# Altium PCB TSAL23.PcbDoc
Units mil, origin at the board's own origin, x right, y up, seen from the top; angles counter-clockwise.
Board outline 2050 x 2632.13 mil, 2 copper layers (Top Layer, Bottom Layer); 42 components, 47 nets, 195 pads, 55 vias.
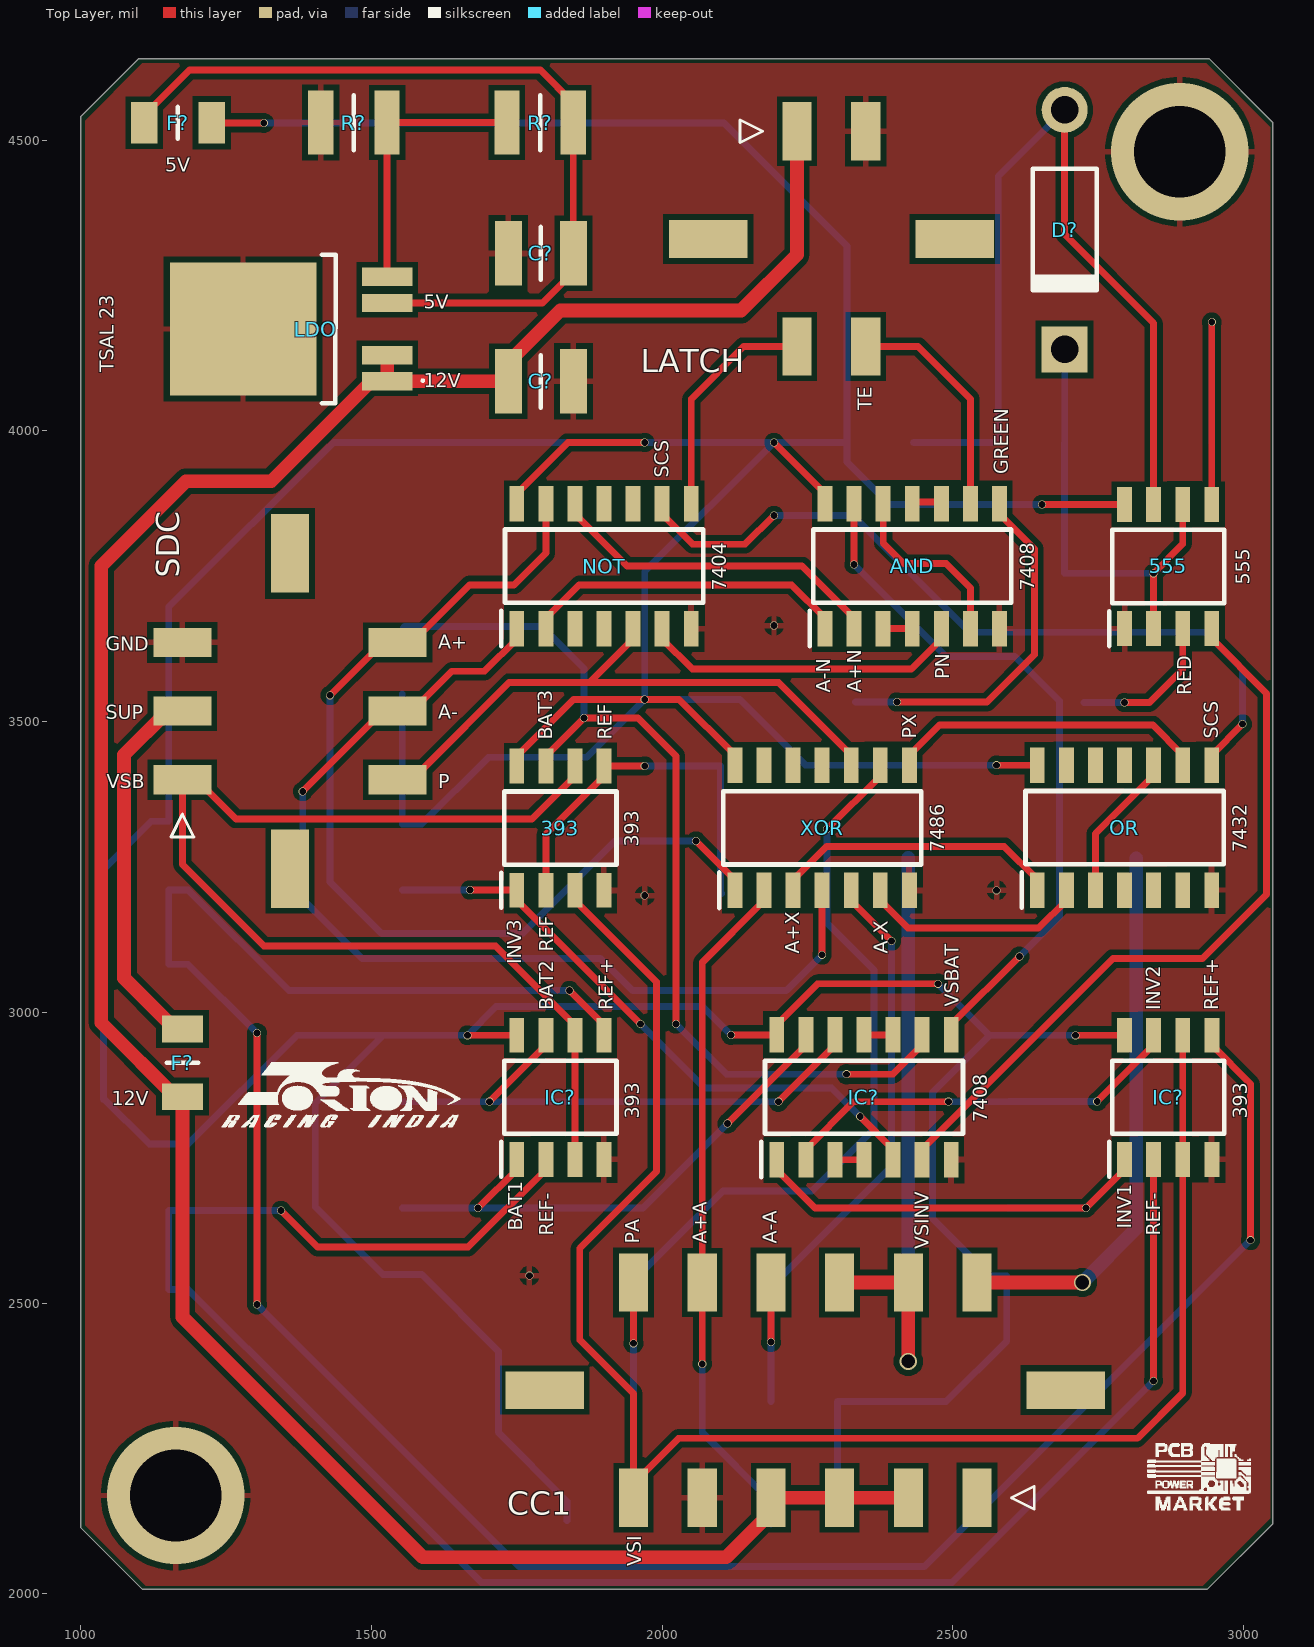
[diagram p0: Top Layer view]
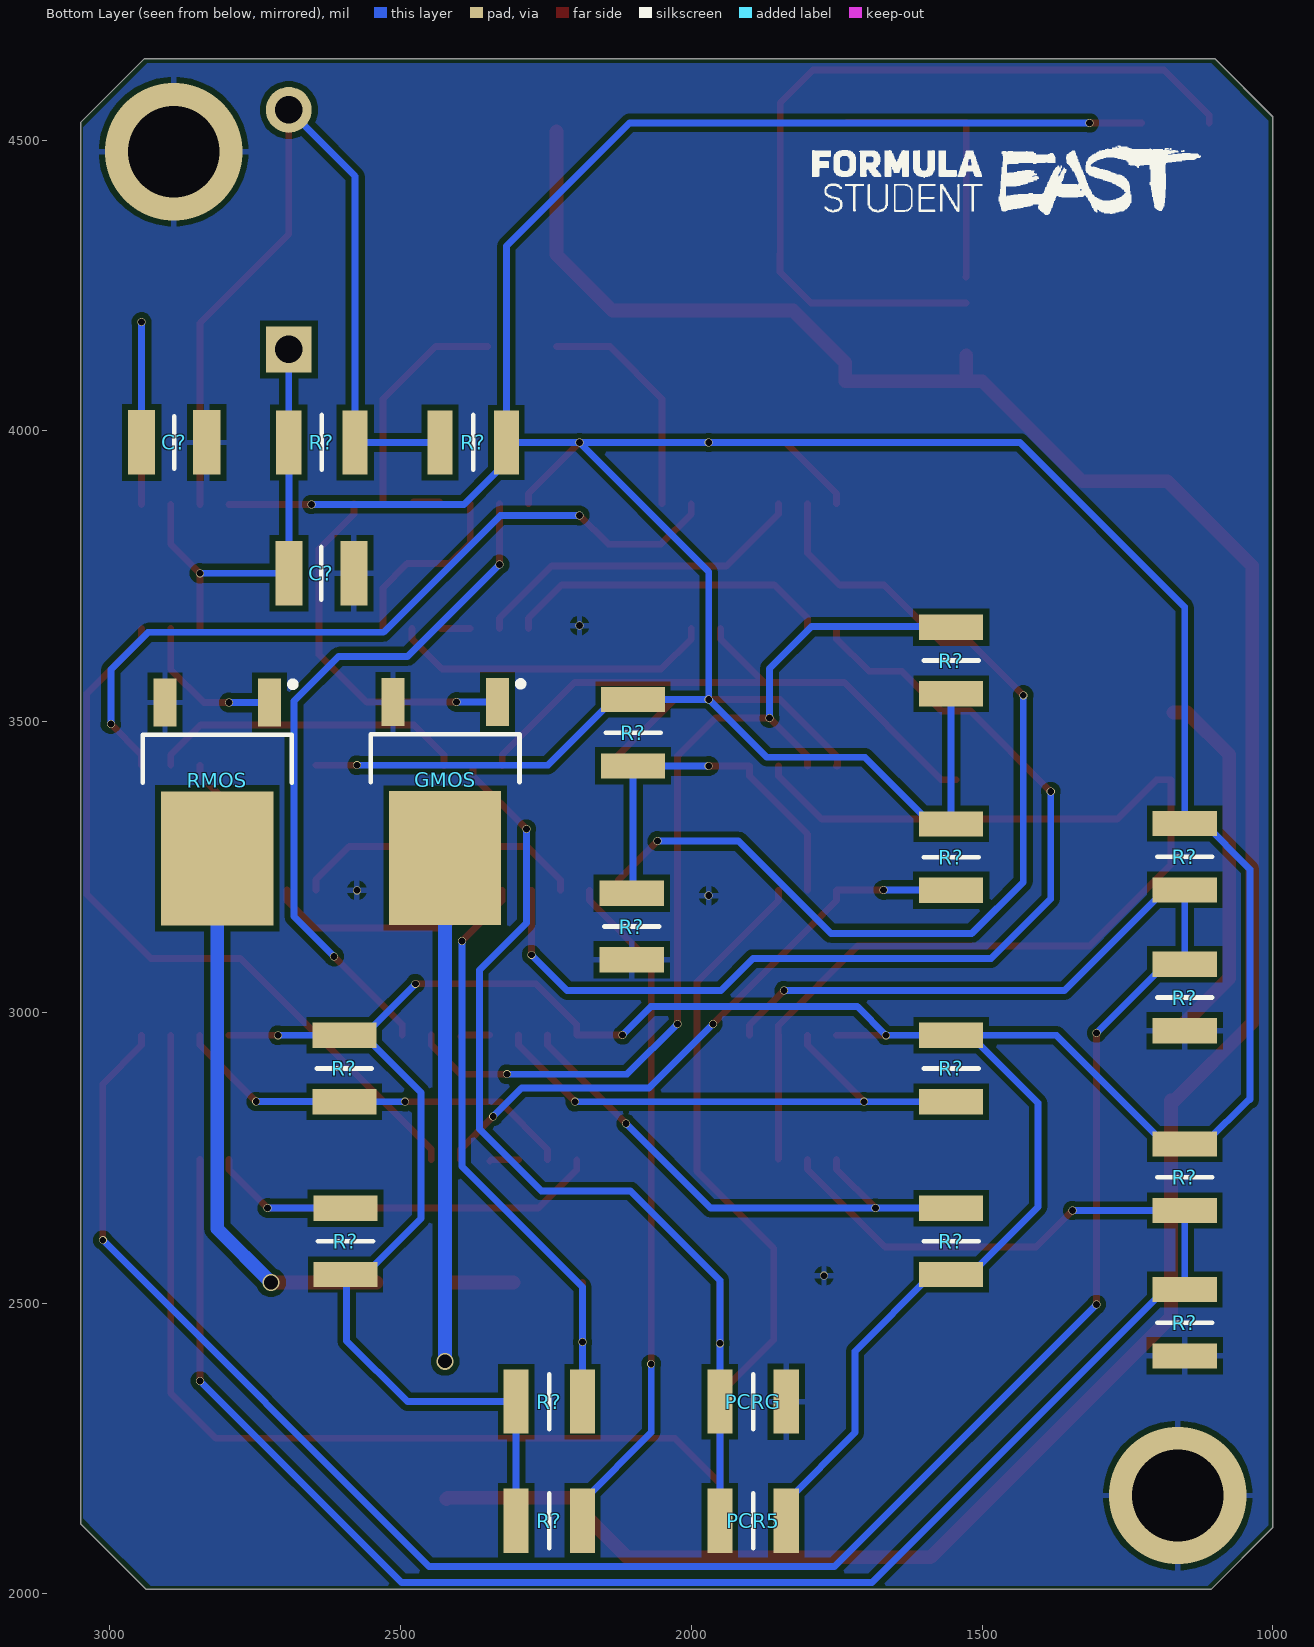
[diagram p1: Bottom Layer view, seen from below]
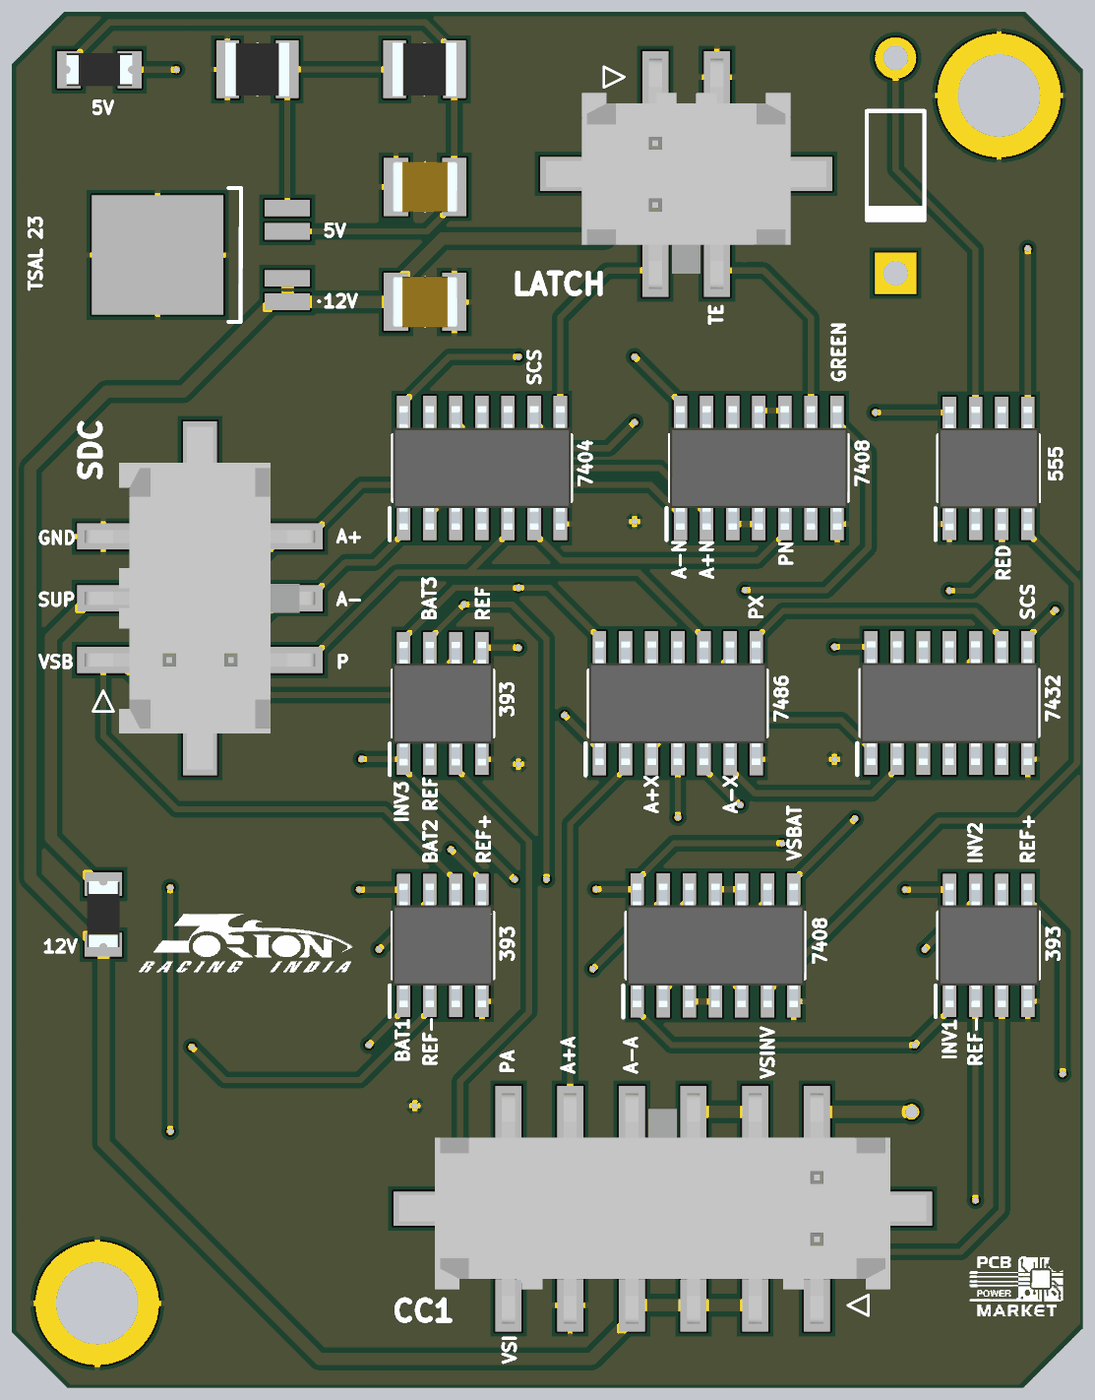
[diagram p2: 3D render of the assembled board from above, using the file's embedded part models]
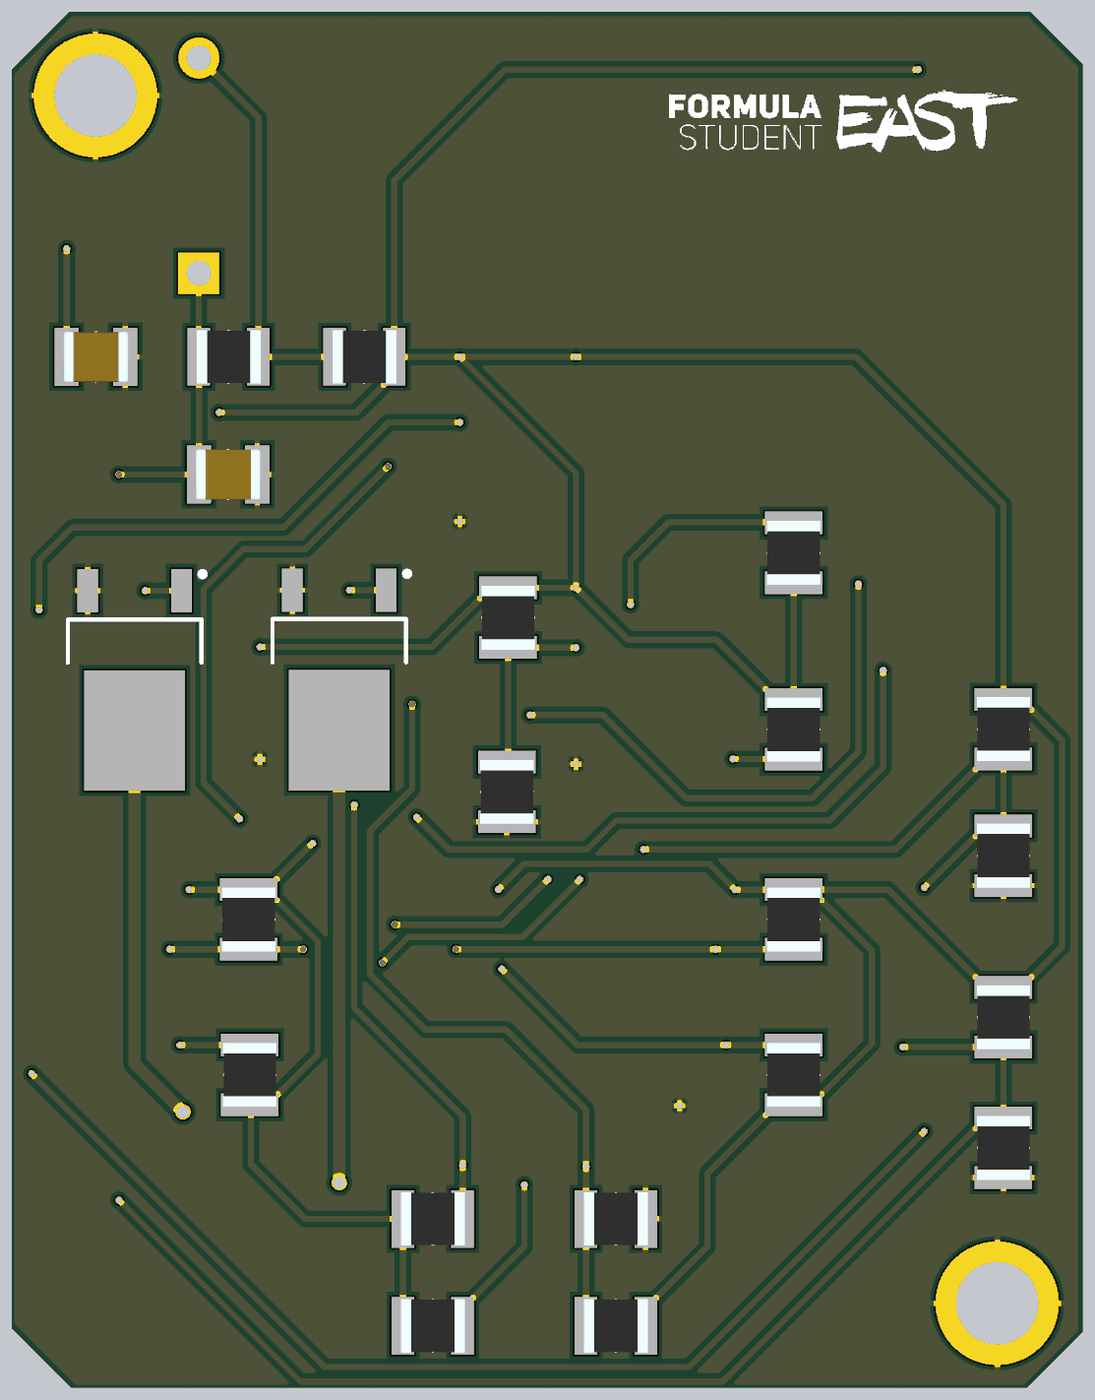
[diagram p3: 3D render of the assembled board from below, using the file's embedded part models]

## Layer stack, top to bottom
Top Solder: solder mask 0.4, Solder Resist, Dk 3.5
Top Layer: signal copper 1.4
Dielectric 1: dielectric 12.6, FR-4, Dk 4.8
Bottom Layer: signal copper 1.4
Bottom Solder: solder mask 0.4, Solder Resist, Dk 3.5

## Board outline
2937.01,2007.87 3049.21,2120.08 3050,2120.08 3050,4530 2940,4640 1100,4640 1000,4540 1000,2114.17 1106.3,2007.87

## Design rules (kind name [scope] priority, off if disabled: settings)
Clearance [All] p1: gap=10 ignorepadtopadclearanceinfootprint=FALSE except(0: Arc-Hole Track-Hole SMDPad-Hole THPad-Hole Via-Hole Fill-Hole Poly-Hole Region-Hole Text-Hole)
PolygonConnect [All] p1: connectstyle=Relief reliefconductorwidth=10 reliefentries=4 polygonreliefangle="90 Angle" airgapwidth=10
RoutingVias [All] p1: holewidth=11.81 width=13.78 viastyle="Through Hole" minholewidth=11.81 minwidth=13.78 maxholewidth=11.81 maxwidth=13.78
SolderMaskExpansion [All] p1: expansion=4 istentingtop=FALSE
Width [All] p1: maxlimit=23.62 minlimit=11.81 preferedwidth=23.62
30 further rules are at their usual default settings.

## Classes and differential pairs
component class TSAL23: 393 555 AND C? CC1 D? F? GMOS IC? LATCH LDO NOT OR PCR5 PCRG R? RMOS SDC XOR

## Components (designator, comment, footprint, x,y, rotation, side; value= is the part's Value field where it differs from the comment)
393 "LM393D" SOIC127P600X175-8N 1825,3316.77 r90 top
555 "NE555DRG4" SOIC127P600X175-8N 2870,3766.77 r90 top
AND "MC74HC08ADG" SOIC127P600X175-14N 2430,3767.28 r90 top
C? "10uF" CAPC3225X145N 1791.34,4305.12 r180 top
C? "10uF" CAPC3225X145N 1791.34,4085 r0 top
C? "0.1uF" CAPC3225X145N 2889,3980 r0 bottom
C? "10uF" CAPC3225X145N 2636,3755 r0 bottom
CC1 "43045-1219" 43045-12YY_181920 2246.06,2350.39 r0 top
D? "Diode 1N4007" DO-41 2692,4345.91 r270 top
F? "NANOSMDC020F-2" NANOSMDC016F2 1167.32,4529.53 r180 top
F? "NANOSMDC020F-2" NANOSMDC016F2 1175.2,2913.39 r90 top
GMOS "STD10NF10T4" TO228P972X240-3N 2423.23,3362.2 r270 bottom
IC? "LM393D" SOIC127P600X175-8N 1825,2854 r90 top
IC? "MC74HC08ADG" SOIC127P600X175-14N 2347,2854 r90 top
IC? "LM393D" SOIC127P600X175-8N 2870.08,2854 r90 top
LATCH "43045-0419" 43045-04YY_181920 2290.94,4330.04 r180 top
LDO "TLF1963TEATMA1" TLF1963TEATMA1 1360,4175 r90 top
NOT "MC74AC04DG" SOIC127P600X175-14N 1900,3767.28 r90 top
OR "MC74HC32ADG" SOIC127P600X175-14N 2795,3317.72 r90 top
PCR5 "10K" RESC3126X60N 1893.7,2125.98 r180 bottom
PCRG "10K" RESC3126X60N 1893.7,2330.71 r0 bottom
R? "10K" RESC3126X60N 1553.1,2903.54 r90 bottom
R? "10K" RESC3126X60N 2594.49,2606.3 r270 bottom
R? "1.2K" RESC3126X60N 1151.57,3267.72 r90 bottom
R? "10K" RESC3126X60N 1151.57,2716.54 r90 bottom
R? "10K" RESC3126X60N 2596.46,2903.54 r90 bottom
R? "10K" RESC3126X60N 1151.57,3025.59 r90 bottom
R? "1.2K" RESC3126X60N 1151.57,2466.54 r90 bottom
R? "10K" RESC3126X60N 1553.15,2606.3 r270 bottom
R? "10K" RESC3126X60N 2244.09,2330.71 r0 bottom
R? "10K" RESC3126X60N 2100,3481 r90 bottom
R? "3.9K" RESC3126X60N 2102.36,3147.64 r90 bottom
R? "10K" RESC3126X60N 2244.09,2125.98 r0 bottom
R? "10K" RESC3126X60N 1553.1,3267.09 r90 bottom
R? "220K" RESC3126X60N 2635,3980 r180 bottom
R? "10K" RESC3126X60N 1790,4530 r0 top
R? "3.3K" RESC3126X60N 1470,4530 r180 top
R? "10K" RESC3126X60N 1553.1,3605 r270 bottom
R? "220K" RESC3126X60N 2375,3980 r180 bottom
RMOS "STD10NF10T4" TO228P972X240-3N 2815,3361.46 r270 bottom
SDC "43045-0619" 43045-06YY_181920 1360.04,3518.11 r270 top
XOR "MC74HC86ADG" SOIC127P600X175-14N 2275,3317.28 r90 top

## Footprints (in the part's own frame and the unit in brackets; to place one, negate y for a bottom-side part, rotate by r counter-clockwise, add the part's x,y. Pads: shape width x height; smd on the part's side, far side on the other; paste and mask are expansions set on the pad)
43045-04YY_181920 [mm]
  rect 1.27x2.54 smd: 1(1.5,-4.7) 2(-1.5,-4.7) 3(1.5,4.7) 4(-1.5,4.7)
  rect 3.43x1.65 smd: 5(5.385,0) 6(-5.385,0)
  silkscreen extent 3,-5.2 4,-4.2, body extent -6.83,-5.6 6.83,5.6, height 9.96
43045-06YY_181920 [mm]
  rect 1.27x2.54 smd: 1(3,-4.7) 2(0,-4.7) 3(-3,-4.7) 4(3,4.7) 5(0,4.7) 6(-3,4.7)
  rect 3.43x1.65 smd: 7(6.885,0) 8(-6.885,0)
  silkscreen extent 4.5,-5.2 5.5,-4.2, body extent -8.32,-5.6 8.32,5.6, height 9.96
43045-12YY_181920 [mm]
  rect 1.27x2.54 smd: 1(7.5,-4.7) 2(4.5,-4.7) 3(1.5,-4.7) 4(-1.5,-4.7) 5(-4.5,-4.7) 6(-7.5,-4.7) 7(7.5,4.7) 8(4.5,4.7) 9(1.5,4.7) 10(-1.5,4.7) 11(-4.5,4.7) 12(-7.5,4.7)
  rect 3.43x1.65 smd: 13(11.385,0) 14(-11.385,0)
  silkscreen extent 9,-5.2 10,-4.2, body extent -12.83,-5.6 12.83,5.6, height 9.95
CAPC3225X145N [mm]
  rect 1.18x2.82 smd: 1(-1.42,0) 2(1.42,0)
  silkscreen extent 0,-1.15 0,1.15, body extent -1.6,-1.25 1.6,1.25, height 1.45
DO-41 [mm] "Diode, Axial; Body 5.2 x 2.7 mm (LxDia. max), Lead Dia. 0.86 mm (max)"
  round 2 hole 1.2: 1(-5.23,0)
  rect 2x2 hole 1.2: 2(5.23,0)
  silkscreen extent -2.65,-1.4 2.75,1.4
NANOSMDC016F2 [mm]
  rect 1.16x1.81 smd: 1(-1.475,0) 2(1.475,0)
  silkscreen extent 0,-0.69 0,0.69, body extent -1.6,-0.79 1.6,0.79, height 0.82
RESC3126X60N [mm]
  rect 1.1x2.8 smd: 1(-1.45,0) 2(1.45,0)
  silkscreen extent 0,-1.2 0,1.2, body extent -1.55,-1.3 1.55,1.3, height 0.6
SOIC127P600X175-8N [mm]
  rect 1.525x0.65 smd: 1(-2.712,1.905) 2(-2.712,0.635) 3(-2.712,-0.635) 4(-2.712,-1.905) 5(2.712,-1.905) 6(2.712,-0.635) 7(2.712,0.635) 8(2.712,1.905)
  silkscreen extent -3.47,-2.45 1.6,2.58, body extent -3,-2.45 3,2.45, height 1.75
SOIC127P600X175-14N [mm]
  rect 1.55x0.65 smd: 1(-2.725,3.81) 2(-2.725,2.54) 3(-2.725,1.27) 4(-2.725,0) 5(-2.725,-1.27) 6(-2.725,-2.54) 7(-2.725,-3.81) 8(2.725,-3.81) 9(2.725,-2.54) 10(2.725,-1.27) 11(2.725,0) 12(2.725,1.27) 13(2.725,2.54) 14(2.725,3.81)
  silkscreen extent -3.5,-4.33 1.6,4.48, body extent -3,-4.33 3,4.33, height 1.75
TLF1963TEATMA1 [mm]
  rect 0.8x2.2 smd: 1(-2.28,-4.25) 2(-1.14,-4.25) 4(1.14,-4.25) 5(2.28,-4.25)
  rect 5.8x6.4 smd: 3(0,2.05)
  silkscreen extent -3.25,-5.85 3.25,-1.4
TO228P972X240-3N [mm]
  rect 2.1x1 smd: 1(-4.35,2.28) 3(-4.35,-2.28)
  rect 5.85x4.9 smd: 4(2.45,0)
  silkscreen extent -5.27,-3.25 -0.85,3.42

## Part data
393 IC? IC?: "Integrated Circuit", Manufacturer_Name=STMicroelectronics, Mouser Part Number=511-LM393D, Arrow Part Number=LM393D, Arrow Price/Stock=https://www.arrow.com/en/products/lm393d/stmicroelectronics?region=europe, Datasheet Link=http://www.st.com/st-web-ui/static/active/en/resource/technical/document/datasheet/CD00000465.pdf, Height=1.75mm, Manufacturer_Part_Number=LM393D, Mouser Price/Stock=https://www.mouser.co.uk/ProductDetail/STMicroelectronics/LM393D?qs=htKRmzjvioSpfPyLiLnV1A%3D%3D
555: "Integrated Circuit", Manufacturer_Name="Texas Instruments", Mouser Part Number=595-NE555DRG4, Arrow Part Number=NE555DRG4, Arrow Price/Stock=https://www.arrow.com/en/products/ne555drg4/texas-instruments?region=nac, Datasheet Link=http://www.mouser.com/ds/2/405/ne555-557499.pdf, Height=1.75mm, Manufacturer_Part_Number=NE555DRG4, Mouser Price/Stock=https://www.mouser.co.uk/ProductDetail/Texas-Instruments/NE555DRG4?qs=rLYyFdxB%2FmreBHawQCpQ0Q%3D%3D
AND IC?: "Integrated Circuit", Manufacturer_Name="ON Semiconductor", Mouser Part Number=863-MC74HC08ADG, Arrow Part Number=MC74HC08ADG, Arrow Price/Stock=https://www.arrow.com/en/products/mc74hc08adg/on-semiconductor, Datasheet Link=http://www.onsemi.com/pub/Collateral/MC74HC08A-D.PDF, Height=1.75mm, Manufacturer_Part_Number=MC74HC08ADG, Mouser Price/Stock=https://www.mouser.co.uk/ProductDetail/ON-Semiconductor/MC74HC08ADG?qs=qg33o%252B8vzFqW0duu5mW%2FLA%3D%3D
C? C? C? C?: library part CC1210KKX7R8BB105, "Capacitor", Manufacturer_Name="YAGEO (PHYCOMP)", Mouser Part Number=603-CC121KKX7R8BB105, Arrow Part Number=CC1210KKX7R8BB105, Arrow Price/Stock=https://www.arrow.com/en/products/cc1210kkx7r8bb105/yageo?region=nac, Datasheet Link=https://datasheet.datasheetarchive.com/originals/distributors/Datasheets_SAMA/d9f127a4875522309d99aa7dec79633c.pdf, Height=1.45mm, Manufacturer_Part_Number=CC1210KKX7R8BB105, Mouser Price/Stock=https://www.mouser.com/Search/Refine.aspx?Keyword=603-CC121KKX7R8BB105
CC1: "Connector", Manufacturer_Name=Molex, Mouser Part Number=538-43045-1219, Datasheet Link=https://www.molex.com/pdm_docs/sd/430450218_sd.pdf, Height=9.91mm, Manufacturer_Part_Number=43045-1219, Mouser Price/Stock=https://www.mouser.co.uk/ProductDetail/Molex/43045-1219?qs=359VwiUTsp3iCU2NVYxNVg%3D%3D
D?: "1 Amp General Purpose Rectifier", Code_JEDEC=DO-204-AL, ComponentLink1Description="Manufacturer Link", ComponentLink1URL=http://www.fairchildsemi.com/, ComponentLink2Description=Datasheet, ComponentLink2URL=http://www.fairchildsemi.com/ds/1N%2F1N4001.pdf, DatasheetVersion=1998, LatestRevisionDate=17-Jul-2002, LatestRevisionNote="Re-released for DXP Platform.", PackageDescription="Diode, Axial; Body 5.2 x 2.7 mm (LxDia. max), Lead Dia. 0.86 mm (max)", PackageReference=DO-41, PackageVersion=Aug-1999, Published=8-Jun-2000, Publisher="Altium Limited"
F? F?: "Resettable Fuse", Manufacturer_Name=LITTELFUSE, Mouser Part Number=650-NANOSMDC020F-2, Arrow Part Number=NANOSMDC020F-2, Arrow Price/Stock=https://www.arrow.com/en/products/nanosmdc020f-2/littelfuse, Datasheet Link=https://www.littelfuse.com/~/media/electronics/datasheets/resettable_ptcs/littelfuse_ptc_nanosmdc_datasheet.pdf.pdf, Height=1mm, Manufacturer_Part_Number=NANOSMDC020F-2, Mouser Price/Stock=https://www.mouser.co.uk/ProductDetail/Littelfuse/NANOSMDC020F-2?qs=iK0evp%252BCRRU6agwMt7HYjg%3D%3D
GMOS RMOS: "Integrated Circuit", Manufacturer_Name=STMicroelectronics, Mouser Part Number=511-STD10NF10, Arrow Part Number=STD10NF10T4, Arrow Price/Stock=https://www.arrow.com/en/products/std10nf10t4/stmicroelectronics, Datasheet Link=http://www.st.com/web/en/resource/technical/document/datasheet/CD00002133.pdf, Height=2.4mm, Manufacturer_Part_Number=STD10NF10T4, Mouser Price/Stock=https://www.mouser.co.uk/ProductDetail/STMicroelectronics/STD10NF10T4?qs=El1T93pd01%2FBh%252BX9NfIsIQ%3D%3D
LATCH: "Connector", Manufacturer_Name=Molex, Mouser Part Number=538-43045-0419, Datasheet Link=https://www.molex.com/pdm_docs/sd/430450218_sd.pdf, Height=9.91mm, Manufacturer_Part_Number=43045-0419, Mouser Price/Stock=https://www.mouser.co.uk/ProductDetail/Molex/43045-0419?qs=UeCeOHRHQebVNIQyI9VWWg%3D%3D
LDO: "Integrated Circuit", Manufacturer_Name=Infineon, Mouser Part Number=726-TLF1963TEATMA1, Arrow Part Number=TLF1963TEATMA1, Arrow Price/Stock=https://www.arrow.com/en/products/tlf1963teatma1/infineon-technologies-ag?region=nac, Datasheet Link=https://www.infineon.com/dgdl/Infineon-TLF1963-DS-v01_00-EN.pdf?fileId=5546d46258fc0bc1015969d2981941e0, Height=2.35mm, Manufacturer_Part_Number=TLF1963TEATMA1, Mouser Price/Stock=https://www.mouser.co.uk/ProductDetail/Infineon-Technologies/TLF1963TEATMA1?qs=SiyfpgnvCZluIGE%2FbZiglw%3D%3D
NOT: "Integrated Circuit", Manufacturer_Name="ON Semiconductor", Mouser Part Number=863-MC74AC04DG, Arrow Part Number=MC74AC04DG, Arrow Price/Stock=https://www.arrow.com/en/products/mc74ac04dg/on-semiconductor, Datasheet Link=https://www.onsemi.com/pub/Collateral/MC74AC04-D.PDF, Height=1.75mm, Manufacturer_Part_Number=MC74AC04DG, Mouser Price/Stock=https://www.mouser.co.uk/ProductDetail/ON-Semiconductor/MC74AC04DG?qs=dFKnUM%2FquJbTyBC81Rgreg%3D%3D
OR: "Integrated Circuit", Manufacturer_Name="ON Semiconductor", Mouser Part Number=863-MC74HC32ADG, Arrow Part Number=MC74HC32ADG, Arrow Price/Stock=https://www.arrow.com/en/products/mc74hc32adg/on-semiconductor, Datasheet Link=http://www.onsemi.com/pub/Collateral/MC74HC32A-D.PDF, Height=1.75mm, Manufacturer_Part_Number=MC74HC32ADG, Mouser Price/Stock=https://www.mouser.co.uk/ProductDetail/ON-Semiconductor/MC74HC32ADG?qs=qg33o%252B8vzFqwIcd4MqFgRQ%3D%3D
PCR5 PCRG R? R? R? R? R? R? R? R? R? R? R? R? R? R? R? R? R? R?: library part RC1210JR-070RL, "Resistor", Manufacturer_Name="YAGEO (PHYCOMP)", Mouser Part Number=603-RC1210JR-070RL, Arrow Part Number=RC1210JR-070RL, Arrow Price/Stock=https://www.arrow.com/en/products/rc1210jr-070rl/yageo, Datasheet Link=https://datasheet.datasheetarchive.com/originals/distributors/Datasheets_SAMA/902f9e387b938f871d31120f5fc1d65e.pdf, Height=0.6mm, Manufacturer_Part_Number=RC1210JR-070RL, Mouser Price/Stock=https://www.mouser.co.uk/ProductDetail/YAGEO/RC1210JR-070RL?qs=eVUp2xEqV%2FtpfK61W3Q4CQ%3D%3D
SDC: "Connector", Manufacturer_Name=Molex, Mouser Part Number=538-43045-0619, Arrow Part Number=43045-0619, Arrow Price/Stock=https://www.arrow.com/en/products/43045-0619/molex, Datasheet Link=https://www.molex.com/pdm_docs/sd/430450218_sd.pdf, Height=9.91mm, Manufacturer_Part_Number=43045-0619, Mouser Price/Stock=https://www.mouser.co.uk/ProductDetail/Molex/43045-0619?qs=KC2ywxza1kr7EVu5MuTw7g%3D%3D
XOR: "Integrated Circuit", Manufacturer_Name=onsemi, Mouser Part Number=863-MC74HC86ADG, Datasheet Link=https://www.onsemi.com/pub/Collateral/MC74HC86A-D.PDF, Height=1.75mm, Manufacturer_Part_Number=MC74HC86ADG, Mouser Price/Stock=https://www.mouser.co.uk/ProductDetail/onsemi/MC74HC86ADG?qs=qg33o%252B8vzFo7NVdnNP3ThA%3D%3D

## Via types
v1: diameter 13.78, hole 11.81, Top Layer to Bottom Layer, 51 vias
v2: diameter 29.53, hole 23.62, Top Layer to Bottom Layer, 2 vias
v3: diameter 236.22, hole 157.48, Top Layer to Bottom Layer, 2 vias

## Nets (pads, with @x,y where several pads share a name; then routed paths per layer and width w, separated by ;. In a path a pad name is that pad's centre, name@x,y a point inside that pad or via, vN(x,y) a via of type N, cw(c..) or ccw(c..) an arc to the next point about the centre after c; other vN are vias at no path point)
5V: C?.1@1847.24,4305.12 F?.2@1109.25,4529.53 LDO.4 R?.2@1847.09,4530 | length 1438.8
  Top Layer w11.81: F?.2@1109.25,4529.53 1109.25,4542.32 1187.01,4620.08 1790.47,4620.08 1847.09,4563.46 1847.09,4305.28 1847.24,4305.12 1847.24,4272.83 1794.29,4219.88 LDO.4
+5: 393.8 555.8 AND.14 F?.1@1225.39,4529.53 IC?.8@1750,2960.77 IC?.8@2795.08,2960.77 IC?.14 NOT.14 OR.14 PCR5.2 R?.2@1151.57,2773.62 R?.2@1151.57,3324.8 R?.2@1553.1,2960.63 R?.2@1553.1,3324.17 R?.2@1553.1,3547.91 R?.2@1553.15,2549.21 R?.2@2100,3538.09 R?.2@2301.18,2125.98 R?.2@2301.18,2330.71 R?.2@2317.91,3980 R?.2@2594.49,2549.21 R?.2@2596.46,2960.63 XOR.14 | length 11496
  Top Layer w11.81: F?.1@1225.39,4529.53 v1(1314.96,4529.53) ; v1(1665.35,2960.63) IC?.8@1750,2960.63 ; 393.8 1748.35,3423.54 1748.35,3439.11 1847.32,3538.09 v1(1970,3538.09) ; NOT.14 1750,3892.28 1837.72,3980 v1(1970,3980) ; v1@1970,3538.18 2029.1,3538.18 2125,3442.28 XOR.14 ; v1(2118.11,2961.28) IC?.14 2197,2979 2267.21,3049.21 v1(2474.41,3049.21) ; v1(2192.28,3980) 2280,3892.28 AND.14 ; v1(2575,3425) OR.14 ; v1(2653,3873.54) 555.8 ; v1(2710.63,2960.63) IC?.8@2795.28,2960.63
  Bottom Layer w11.81: 1039.37,2850.39 1039.37,2852.36 ; v1(1314.96,4529.53) 2106.3,4529.53 2317.91,4317.91 R?.2@2317.91,3980 ; R?.2@1553.1,3547.91 1553.1,3324.17 1586.56,3324.17 1701.05,3438.66 1869.76,3438.66 v1@1968.5,3537.4 ; PCR5.2 1836.61,2159.45 1718.5,2277.56 1718.5,2417.32 1586.61,2549.21 1553.15,2549.21 1519.69,2549.21 1403.54,2665.35 1403.54,2844.54 R?.2@1519.64,2960.63 ; v1(2118.11,2961.28) 2069.55,3009.84 1714.57,3009.84 v1(1665.35,2960.63) 1553.1,2960.63 R?.2@1519.64,2960.63 ; R?.2@2301.18,2125.98 2301.18,2330.71 2488.19,2330.71 2592.52,2435.04 2592.52,2547.24 2562.99,2547.24 2464.57,2645.67 2464.57,2862.2 R?.2@2562.99,2960.63 ; v1(2474.41,3049.21) R?.2@2562.99,2960.63 ; v1(2575,3425) 2246.55,3425 2133.46,3538.09 2100,3538.09 v1(1970,3538.09) 1970,3757.72 v1(2192.28,3980) ; v1(2653,3873.54) 2390.91,3873.54 2317.91,3946.54 R?.2@2317.91,3980 ; v1(2710.63,2960.63) 2596.46,2960.63 R?.2@2562.99,2960.63 ; 1039.37,2852.36 1118.11,2773.62 1151.57,2773.62 1185.04,2773.62 1372.05,2960.63 R?.2@1519.64,2960.63 ; 1039.37,2852.36 1039.37,3246.06 1122.05,3328.74 1151.57,3328.74 1151.57,3696.85 1434.72,3980 v1(1970,3980) v1(2192.28,3980) ; v1(2192.28,3980) R?.2@2317.91,3980
+12: C?.1@1735.43,4085 CC1.2 CC1.3 CC1.4 F?.1@1175.2,2855.31 LATCH.1 LDO.1 LDO.2 | length 4520.3
  Top Layer w23.62: LDO.2 LDO.1 ; LATCH.1 2231.89,4302.76 2135.83,4206.69 1824.84,4206.69 1735.43,4117.28 1735.43,4085 1735.2,4085.24 LDO.1 ; CC1.3@2303.15,2165.35 CC1.4 2187.01,2140.35 2109.65,2062.99 1588.58,2062.99 1175.2,2476.38 1175.2,2848.43 1169.29,2848.43 1035.43,2982.28 1035.43,3767.72 1181.1,3913.39 1327.91,3913.39 1499.76,4085.24 LDO.1 ; CC1.3 2419.29,2165.35 CC1.2@2421.26,2163.39
"AIR OR": OR.3 OR.10 | length 256
  Top Layer w11.81: OR.3 2745,3307.28 2845,3407.28 OR.10
"AIR+VE 5V": NOT.13 SDC.6 XOR.1 | length 1721.4
  Top Layer w11.81: v1(1429.13,3545.28) 1520.08,3636.22 1570.08,3636.22 1668.86,3735 1745,3735 1800,3790 NOT.13 ; v1(2058.14,3294.58) 2125,3227.72 XOR.1
  Bottom Layer w11.81: v1(1429.13,3545.28) 1429.13,3224.41 1517.72,3135.83 1759.84,3135.83 1918.6,3294.58 v1(2058.14,3294.58)
"AIR+VE AUX": CC1.11 R?.1@2187.01,2125.98 XOR.2 | length 1182.8
  Top Layer w11.81: v1(2068.9,2395.67) CC1.11 2068.9,3086.18 2175,3192.28 XOR.2
  Bottom Layer w11.81: v1(2068.9,2395.67) 2068.9,2277.56 2187.01,2159.45 2187.01,2125.98 R?.1@2187.01,2120.08
"AIR+VE NOT": AND.2 NOT.12 | length 589.6
  Top Layer w11.81: NOT.12 1850,3856.85 1939.57,3767.28 2240.43,3767.28 2330,3677.72 AND.2
"AIR+VE XOR": OR.1 XOR.3 | length 502.7
  Top Layer w11.81: XOR.3 2225,3227.72 2282.28,3285 2588.15,3285 2645,3228.15 OR.1
"AIR-VE AUX": CC1.10 R?.1@2187.01,2330.71 XOR.5 | length 1096.4
  Top Layer w11.81: v1(2187.01,2433.07) CC1.10 ; XOR.5 2325,3192.28 v1(2394.47,3122.82)
  Bottom Layer w11.81: R?.1@2187.01,2330.71 v1(2187.01,2433.07) 2187.01,2527.56 2394.47,2735.02 v1(2394.47,3122.82)
"AIR-VE NOT": AND.1 NOT.2 | length 562.9
  Top Layer w11.81: NOT.2 1800,3677.72 1857.28,3735 2222.72,3735 2280,3677.72 AND.1
"AIR-VE XOR": OR.2 XOR.6 | length 394.8
  Top Layer w11.81: XOR.6 2375,3192.28 2422.28,3145 2647.28,3145 2695,3192.72 OR.2
BAT1: IC?.1@1750,2747.23 IC?.13 R?.1@1553.15,2663.39 | length 939.1
  Top Layer w11.81: v1(1683.38,2663.39) 1750,2730 IC?.1@1750,2747.23 ; v1(2112.2,2808.77) 2247,2943.57 IC?.13
  Bottom Layer w11.81: R?.1@1553.15,2663.39 v1(1683.38,2663.39) 1966.82,2663.39 v1(2112.2,2808.77)
BAT2: IC?.7@1800,2960.77 IC?.12 R?.1@1553.1,2846.46 | length 956.5
  Top Layer w11.81: v1(1702.91,2846.46) 1800,2943.55 IC?.7@1800,2960.77 ; v1(2199.89,2846.46) 2297,2943.57 IC?.12
  Bottom Layer w11.81: R?.1@1553.1,2846.46 v1@2200.02,2846.46
BAT3: 393.7 IC?.9 R?.1@1553.1,3662.09 | length 1679.4
  Top Layer w11.81: 393.7 1800,3440.77 v1@1865.49,3506.26 ; v1(1865.49,3506.21) 1958.35,3506.21 2023.62,3440.94 v1(2023.62,2980.32) ; v1(2316.93,2893.7) 2397.13,2893.7 2447,2943.57 IC?.9
  Bottom Layer w11.81: R?.1@1555.12,3661.42 1557.09,3663.39 1793.31,3663.39 1865.49,3591.2 v1(1865.49,3506.21) ; v1(2023.62,2980.32) 2110.24,2893.7 v1(2316.93,2893.7)
GND: 393.4 555.1 AND.7 C?.1@2580.09,3755 C?.1@2833.09,3980 C?.2@1735.43,4305.12 C?.2@1847.24,4085 CC1.5 GMOS.3 IC?.4@1900,2747.23 IC?.4@2945.08,2747.23 IC?.7@2497,2746.72 LATCH.2 LDO.3 NOT.7 OR.7 PCRG.1 R?.1@1151.57,2409.45 R?.1@1151.57,2968.5 R?.1@2102.36,3090.55 R?.2@1412.91,4530 RMOS.3 SDC.3 XOR.7
  other v1: 1771.65,2547.24 1970,3200.79 2575,3210 2192.28,3665
  other v3: 1163.39,2169.29 2890,4480
GREEN: AND.8 GMOS.1 | length 625.5
  Top Layer w11.81: v1(2403.54,3533.46) 2558.46,3533.46 2640,3615 2640,3796.85 2580,3856.85 AND.8
  Bottom Layer w11.81: GMOS.1@2332.68,3533.46 v1(2403.54,3533.46)
INV1: IC?.1@2197,2746.72 IC?.1@2795.08,2747.23 R?.1@2594.49,2663.39 | length 821.8
  Top Layer w11.81: IC?.1@2197,2746.72 2197,2729 2262.61,2663.39 v1(2728.46,2663.39) 2795.08,2730 IC?.1@2795.08,2747.23
  Bottom Layer w11.81: R?.1@2594.49,2663.39 v1(2728.46,2663.39)
INV2: IC?.2@2247,2746.72 IC?.7@2845.08,2960.77 R?.1@2596.46,2846.46 | length 707.2
  Top Layer w11.81: IC?.2@2247,2746.72 2247,2764.43 2329.02,2846.46 v1(2492.13,2846.46) ; v1(2748.03,2846.5) 2845.08,2943.55 IC?.7@2845.08,2960.77
  Bottom Layer w11.81: v1(2492.13,2846.46) 2596.46,2846.46 2596.5,2846.5 v1(2748.03,2846.5)
INV3: 393.1 IC?.5@2397,2746.72 R?.1@1553.1,3210 | length 1056.9
  Top Layer w11.81: v1(1669.29,3210.63) 1749.37,3210.63 393.1 1750,3192.78 1962.6,2980.18 v1(1962.6,2980.32) ; v1(2340.55,2820.87) 2397,2764.43 IC?.5@2397,2746.72
  Bottom Layer w11.81: R?.1@1553.1,3210 1553.73,3210.63 v1(1669.29,3210.63) ; v1@1962.6,2980.18 2072.85,2869.92 2291.5,2869.92 v1(2340.55,2820.87)
LVMS: F?.2@1175.2,2971.46 SDC.2 | length 647.2
  Top Layer w23.62: SDC.2@1171.26,3515.75 1147.64,3515.75 1074.8,3442.91 1074.8,3059.06 1162.4,2971.46 F?.2@1175.2,2971.46
"M5 5V": NOT.1 SDC.5 XOR.4 | length 1774.4
  Top Layer w11.81: v1(1381.89,3379.92) 1520.08,3518.11 1570.08,3518.11 1638.58,3586.61 1694.33,3586.61 1750,3642.28 NOT.1 ; v1(2275,3099.02) XOR.4
  Bottom Layer w11.81: v1(1381.89,3379.92) 1381.89,3194.88 1484.25,3092.52 1893.7,3092.52 1948.82,3037.4 2213.39,3037.4 v1(2275,3099.02)
Net555_5: 555.5 C?.2@2944.91,3980 | length 520.3
  Top Layer w11.81: 555.5 v1(2945,4186.89)
  Bottom Layer w11.81: C?.2@2944.91,3980 2945,3980.09 v1(2945,4186.89)
Net555_7: 555.7 D?.1 R?.1@2432.09,3980 R?.2@2577.91,3980 | length 1506.5
  Top Layer w11.81: D?.1 2692,4338 2845,4185 555.7
  Bottom Layer w11.81: R?.1@2432.09,3980 2577.91,3980 2577.91,4437.72 D?.1
NetAND_3: AND.3 AND.4 | length 50
  Top Layer w11.81: AND.3 AND.4
NetAND_6: AND.6 AND.12 | length 319.5
  Top Layer w11.81: AND.12 2380,3807.01 2415.35,3771.65 2488.35,3771.65 2530,3730 AND.6
NetAND_10: AND.10 AND.11 | length 52.3
  Top Layer w11.81: AND.11 2432.72,3877.28 2477.28,3877.28 AND.10
NetIC?_3: IC?.3@2297,2746.72 IC?.4@2347,2746.72 | length 50.5
  Top Layer w11.81: IC?.3@2297,2746.72 2343.83,2746.72 IC?.4@2346.46,2744.09
NetIC?_10: IC?.10 IC?.11 | length 49.8
  Top Layer w11.81: IC?.11 2393.05,2961.28 IC?.10@2395.67,2958.66
NetLDO_5: LDO.5 R?.1@1527.09,4530 R?.1@1732.91,4530 | length 471.2
  Top Layer w11.81: LDO.5 1527.09,4265 1527.09,4530 R?.1@1732.91,4530
"PCR 5V": NOT.5 SDC.4 XOR.10 | length 1042.7
  Top Layer w11.81: SDC.4 1570.08,3400 1589.17,3419.09 1589.17,3419.17 1736.93,3566.93 1874.65,3566.93 ; NOT.5 1950,3642.28 1874.65,3566.93 ; XOR.10 2325,3442.28 2200.35,3566.93 1874.65,3566.93
"PCR AUX": CC1.12 PCR5.1 PCRG.2 XOR.9 | length 1735.4
  Top Layer w11.81: v1(1950.79,2431.1) CC1.12 ; v1(2283.46,3315.32) 2375,3406.85 XOR.9
  Bottom Layer w11.81: PCR5.1 PCRG.2 v1(1950.79,2431.1) 1950.79,2539.37 2104.33,2692.91 2257.87,2692.91 2364.17,2799.21 2364.17,3072.83 2283.46,3153.54 v1(2283.46,3315.32)
"PCR NOT": AND.5 NOT.6 | length 558.3
  Top Layer w11.81: NOT.6 2000,3642.28 2051.73,3590.55 2428.27,3590.55 2480,3642.28 AND.5
"PCR XOR": OR.9 XOR.8 | length 548.2
  Top Layer w11.81: XOR.8 2425,3442.28 2476.81,3494.09 2843.62,3494.09 2895,3442.72 OR.9
RED: 555.3 RMOS.1 | length 263.5
  Top Layer w11.81: v1(2795,3532.72) 2837.72,3532.72 2895,3590 555.3
  Bottom Layer w11.81: RMOS.1 v1(2795,3532.72)
REF: 393.2 393.5 R?.1@2100,3423.91 R?.2@2102.36,3204.72 | length 676.7
  Top Layer w11.81: 393.2 1800,3306.32 1900,3406.32 393.5 v1(1970,3423.54) v1@1970.47,3423.54
  Bottom Layer w11.81: v1(1970,3423.54) R?.1@2098.11,3423.54 ; R?.1@2100,3423.91 2098.48,3423.91 R?.1@2098.11,3423.54 ; R?.1@2100.39,3421.26 R?.1@2100,3421.65 ; R?.2@2102.36,3204.72 2100,3207.09 R?.1@2100,3421.65 ; R?.1@2098.11,3423.54 R?.1@2100,3421.65
REF+: IC?.5@1900,2960.77 IC?.5@2945.08,2960.77 R?.1@1151.57,3210.63 R?.2@1151.57,3082.68 | length 4164.9
  Top Layer w11.81: v1(1303.15,2498.03) v1(1303.15,2964.57) ; v1(1840.55,3037.4) 1900,2978 IC?.5@1900,2960.77 ; IC?.5@2945.08,2960.77 2945.08,2943.55 3011.81,2876.82 v1(3011.81,2608.27)
  Bottom Layer w11.81: v1(1303.15,2498.03) 1753.94,2047.24 2450.79,2047.24 v1(3011.81,2608.27) ; v1(1303.15,2964.57) 1185.04,3082.68 1151.57,3082.68 1151.57,3210.63 1185.04,3210.63 1358.27,3037.4 v1(1840.55,3037.4)
REF-: IC?.2@1800,2747.23 IC?.2@2845.08,2747.23 R?.1@1151.57,2659.45 R?.2@1151.57,2523.62 | length 3309.4
  Top Layer w11.81: v1(1344.49,2659.45) 1407.48,2596.46 1666.45,2596.46 1800,2730 IC?.2@1800,2747.23 ; v1(2844.78,2366.44) 2844.78,2746.93 IC?.2@2845.08,2747.23
  Bottom Layer w11.81: v1(1344.49,2659.45) 1151.57,2659.45 1151.57,2523.62 1185.04,2523.62 1385.83,2322.83 1688.98,2019.68 2498.03,2019.68 v1(2844.78,2366.44)
SCS: NOT.9 OR.8 | length 1354.2
  Top Layer w11.81: NOT.9 2000,3856.85 2051.85,3805 2142.61,3805 v1(2192.28,3854.67) ; OR.8 2945,3442.72 v1(2998.03,3495.75)
  Bottom Layer w11.81: v1(2192.28,3854.67) 2328.4,3854.67 2529.53,3653.54 2934.23,3653.54 2998.03,3589.74 v1(2998.03,3495.75)
"SCS NOT": LATCH.3 NOT.8 | length 399.6
  Top Layer w11.81: NOT.8 2050,4055 2140,4145 LATCH.3
TSALERROR: AND.9 LATCH.4 | length 397.7
  Top Layer w11.81: LATCH.4 2440,4145 2530,4055 AND.9
TSALGREEN: CC1.8 CC1.9 GMOS.4 | length 1119.3
  Top Layer w23.62: CC1.9 CC1.8 v2(2423.23,2400)
  Bottom Layer w23.62: v2(2423.23,2400) GMOS.4
TSALRED: CC1.7 RMOS.4 | length 949
  Top Layer w23.62: CC1.7 v2(2722.44,2535.43)
  Bottom Layer w23.62: v2(2722.44,2535.43) 2815,2627.99 RMOS.4
VS_BAT_IN: 393.6 IC?.3@1850,2747.23 IC?.6@1850,2960.77 SDC.1 | length 1914.3
  Top Layer w11.81: IC?.6@1850,2960.77 1850,2748.43 IC?.3@1850.39,2748.03 ; 393.6 1850,3406.32 1776.36,3332.68 1267.32,3332.68 1200,3400 SDC.1 1175,3254.13 1314.96,3114.17 1713.82,3114.17 1850.39,2977.6 IC?.6@1850.39,2962.6
VS_INV_IN: 393.3 CC1.6 IC?.3@2895.08,2747.23 IC?.6@2895.08,2960.77 | length 2817.1
  Top Layer w11.81: 393.3 1850,3192.78 1990.16,3052.62 1990.16,2726.38 1858.27,2594.49 1858.27,2437.01 1950.79,2344.49 CC1.6@1950.79,2190.35 ; CC1.6 CC1.6@1950.79,2190.35 ; IC?.3@2895.08,2747.23 2895.08,2345.87 2816.93,2267.72 2028.15,2267.72 CC1.6@1950.79,2190.35 ; IC?.3@2895.08,2749.41 IC?.6@2895.08,2960.77
VSBAT: AND.13 IC?.8@2497,2961.28 | length 1206.1
  Top Layer w11.81: v1(2329.97,3770) AND.13 ; IC?.8@2497,2961.28 2497,2979 v1(2614.17,3096.17)
  Bottom Layer w11.81: v1(2329.97,3770) 2487.76,3612.2 2606.3,3612.2 2683.07,3535.43 2683.07,3165.07 v1(2614.17,3096.17)
VSINV: 555.4 IC?.6@2447,2746.72 | length 1288
  Top Layer w11.81: IC?.6@2447,2746.72 2447,2764.43 2775.09,3092.52 2929.13,3092.52 3039.37,3202.76 3039.37,3548.41 2945,3642.78 555.4
X: 555.2 555.6 C?.2@2691.91,3755 D?.2 R?.1@2692.09,3980 | length 772.5
  Top Layer w11.81: 555.2 v1(2845,3755) 2895,3805 555.6
  Bottom Layer w11.81: D?.2 2692.09,4139.91 2692.09,3980 2691.91,3979.82 2691.91,3755 v1(2845,3755)
pads on no net: CC1.1 CC1.13 CC1.14 LATCH.5 LATCH.6 NOT.3 NOT.4 NOT.10 NOT.11 OR.4 OR.5 OR.6 OR.11 OR.12 OR.13 SDC.7 SDC.8 XOR.11 XOR.12 XOR.13

## Polygon pours and split planes (outlines as drawn)
GND on Top Layer "NONET_L-01_P-001" (solid, pour order 0): 1106.35,4631.89 2935.09,4631.89 3045.33,4521.65 3045.33,2129.92 2929.18,2013.78 1112.26,2013.78 1007.92,2118.11 1007.92,4533.46
GND on Bottom Layer "NONET_L-01_P-001" (solid, pour order 1): 1007.87,2118.11 1007.87,4533.46 1106.3,4631.89 2935.04,4631.89 3045.28,4521.65 3045.28,2129.92 3023.62,2108.27 2929.13,2013.78 1112.2,2013.78 1070.87,2055.12

## Silkscreen, mask and mechanical layers (free items; w line width, h text height)
Top Overlay:
  drawing of 48 lines, arcs and shapes, not listed
  text "5V" at 1145.83,4445.04 h23.62
  text "5V" at 1590,4210 h23.62
  text "TSAL 23" at 1056.93,4100.55 h23.62 r90
  text "12V" at 1590,4075 h23.62
  text "TE" at 2360,4035 h23.62 r90
  text "GREEN" at 2595,3925 h23.62 r90
  text "SCS" at 2011.65,3919.45 h23.62 r90
  text "555" at 3010,3735 h23.62 r90
  text "7404" at 2110,3725 h23.62 r90
  text "7408" at 2640,3725 h23.62 r90
  text "A+" at 1615,3625 h23.62
  text "GND" at 1043.46,3622.2 h23.62
  text "PN" at 2493.94,3572.99 h23.62 r90
  text "A-N" at 2289.21,3549.37 h23.62 r90
  text "A+N" at 2342.36,3549.37 h23.62 r90
  text "RED" at 2910,3545 h23.62 r90
  text "A-" at 1615,3505 h23.62
  text "SUP" at 1043.46,3504.09 h23.62
  text "PX" at 2436.85,3470.63 h23.62 r90
  text "SCS" at 2956.54,3470.63 h23.62 r90
  text "BAT3" at 1810.87,3468.66 h23.62 r90
  text "REF" at 1913.23,3468.66 h23.62 r90
  text "VSB" at 1045,3385 h23.62
  text "P" at 1615,3385 h23.62
  text "393" at 1960,3285 h23.62 r90
  text "7486" at 2485,3275 h23.62 r90
  text "7432" at 3005,3275 h23.62 r90
  text "REF" at 1812.83,3104.49 h23.62 r90
  text "A+X" at 2236.06,3100.55 h23.62 r90
  text "A-X" at 2387.64,3100.55 h23.62 r90
  text "INV3" at 1757.72,3082.83 h23.62 r90
  text "VSBAT" at 2509.68,3010 h23.62 r90
  text "BAT2" at 1812.83,3004.09 h23.62 r90
  text "REF+" at 1915.2,3004.09 h23.62 r90
  text "INV2" at 2856.14,3004.09 h23.62 r90
  text "REF+" at 2956.54,3004.09 h23.62 r90
  text "12V" at 1053.31,2840.71 h23.62
  text "393" at 1960.47,2817.09 h23.62 r90
  text "393" at 3005.75,2817.09 h23.62 r90
  text "7408" at 2558.9,2811.18 h23.62 r90
  text "INV1" at 2806.93,2628.11 h23.62 r90
  text "BAT1" at 1759.68,2624.17 h23.62 r90
  text "REF-" at 1812.83,2616.3 h23.62 r90
  text "REF-" at 2856.14,2616.3 h23.62 r90
  text "PA" at 1960.47,2602.52 h23.62 r90
  text "A+A" at 2076.61,2602.52 h23.62 r90
  text "A-A" at 2196.69,2602.52 h23.62 r90
  text "VSINV" at 2458.5,2592.68 h23.62 r90
  text "VSI" at 1964.41,2047.4 h23.62 r90
Bottom Overlay:
  drawing of 17 lines, arcs and shapes, not listed